# Altium PCB MAIN BOARD V1.3.PcbDoc
Units mil, origin at the board's own origin, x right, y up, seen from the top; angles counter-clockwise.
Board outline 6000 x 4000 mil, 2 copper layers (Top Layer, Bottom Layer); 91 components, 77 nets, 363 pads, 60 vias.
Unrouted connection lines stored in the file: 10.
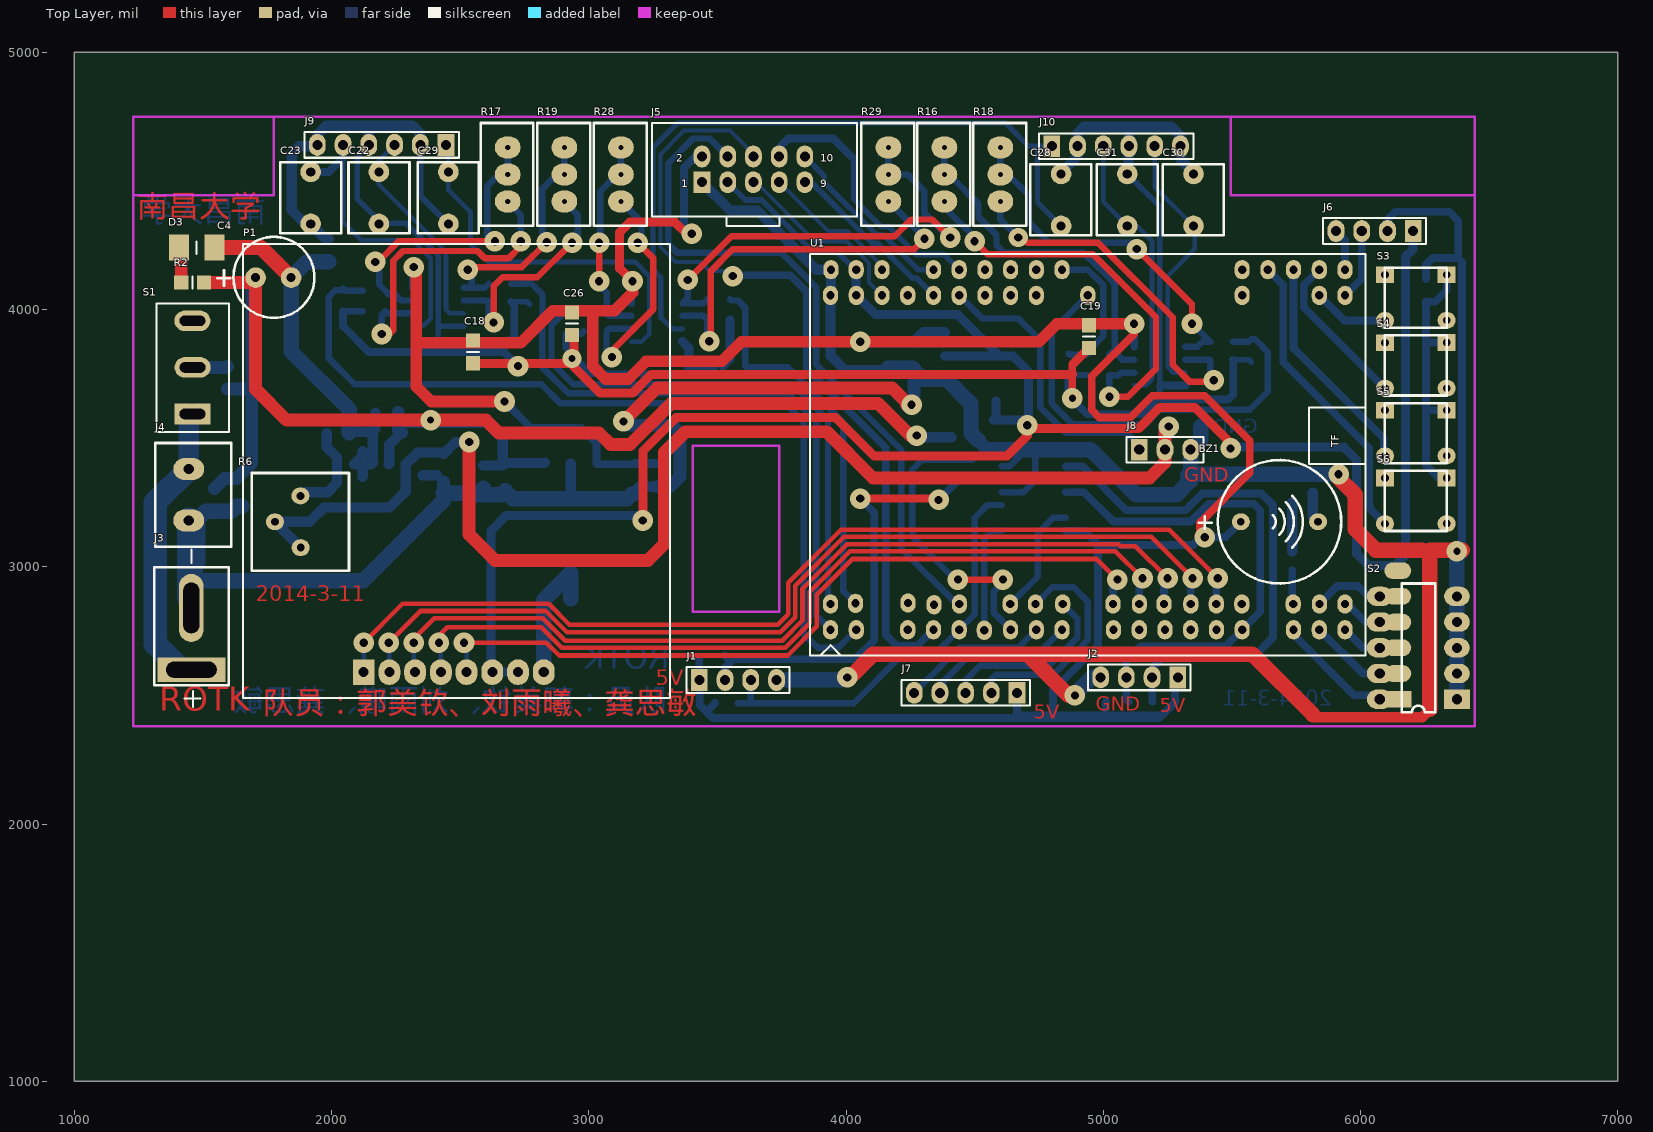
[diagram p0: Top Layer view]
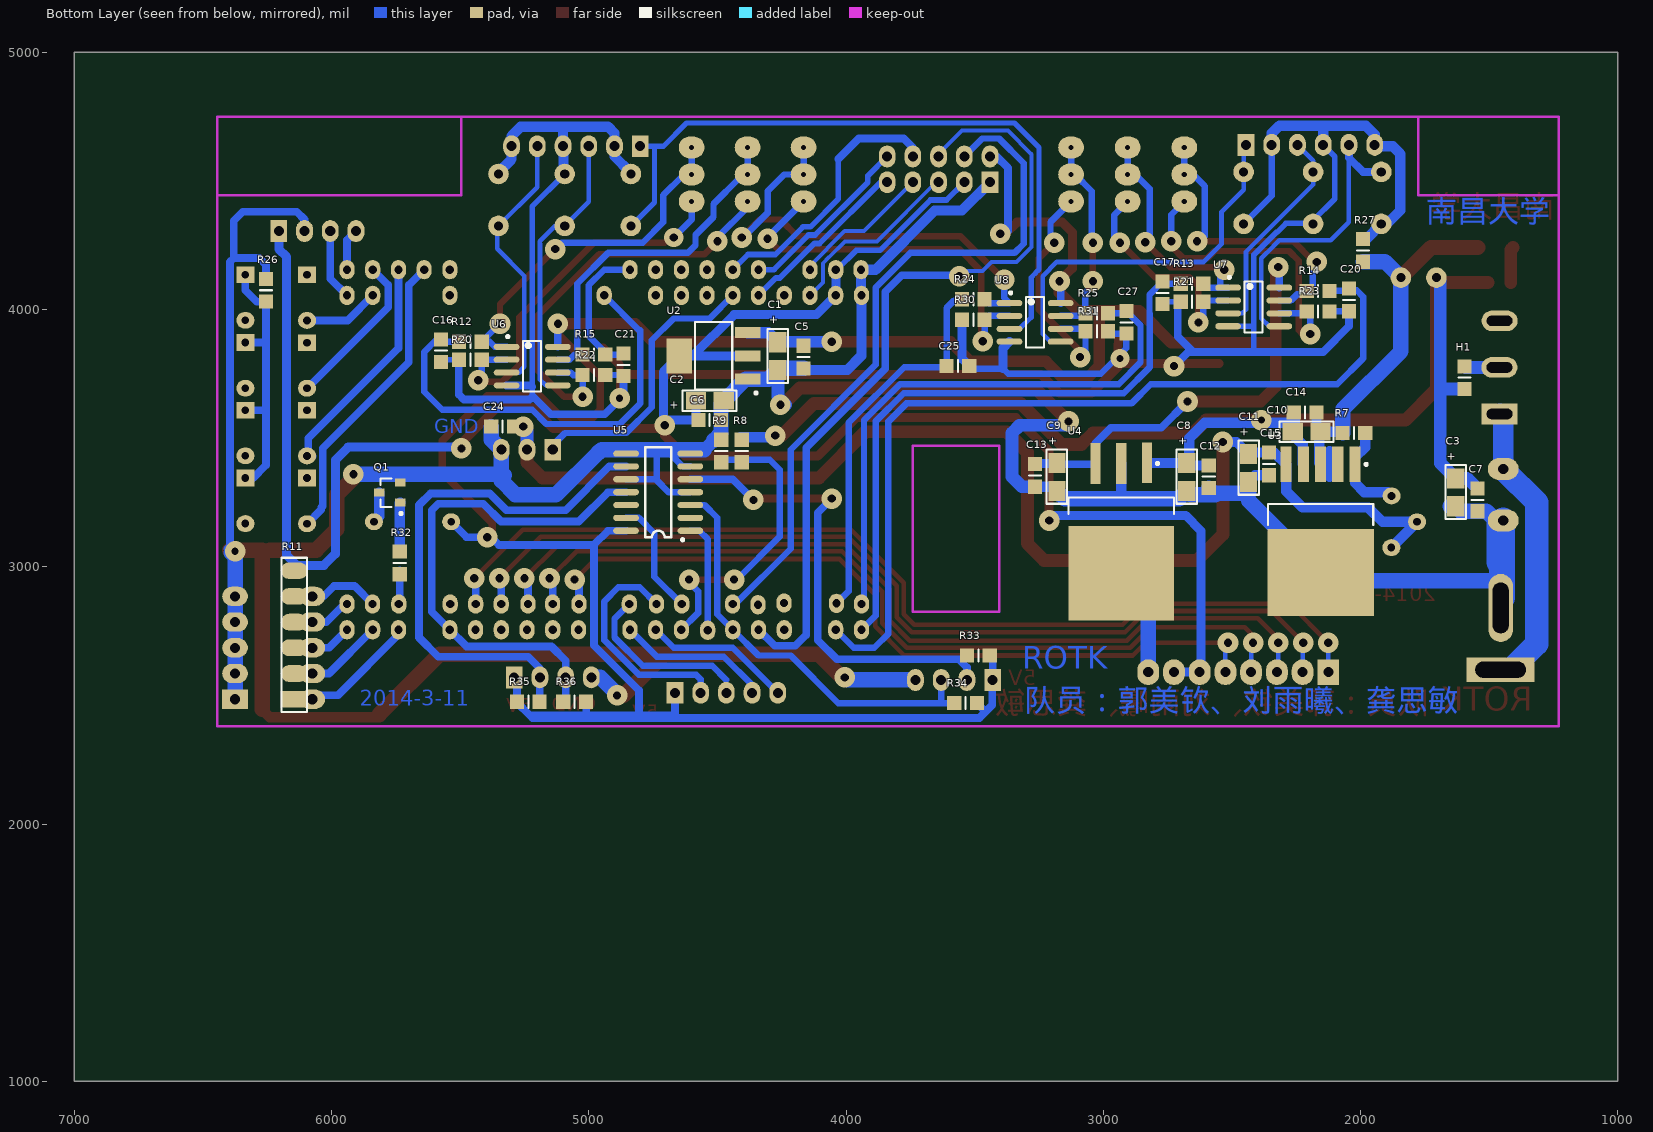
[diagram p1: Bottom Layer view, seen from below]

## Layer stack, top to bottom
Top Layer: signal copper 1.4
Dielectric: dielectric 12.6, FR-4, Dk 4.8
Bottom Layer: signal copper 1.4

## Board outline
1000,1000 7000,1000 7000,5000 1000,5000

## Design rules (kind name [scope] priority, off if disabled: settings)
Clearance [All] p1: gap=10
Height [All] p1: minheight=0 maxheight=10000 prefheight=500
PolygonConnect [All] p1: connectstyle=Relief reliefconductorwidth=10 reliefentries=4 polygonreliefangle="90 Angle"
RoutingVias [All] p1: holewidth=28 width=50 viastyle="Through Hole" minholewidth=28 minwidth=50 maxholewidth=28 maxwidth=50
SilkscreenOverComponentPads [All] p1: minsilkscreentomaskgap=10
SolderMaskExpansion [All] p1: expansion=4
Width [All] p1: maxlimit=100 minlimit=10 preferedwidth=100
26 further rules are at their usual default settings.

## Components (designator, comment, footprint, x,y, rotation, side; value= is the part's Value field where it differs from the comment)
BZ1 "Speaker" SPEAKER 5535,3175 r0 top
C1 "CAP_3216(1206)" CAP_3216（1206） 4265,3820 r270 bottom
C2 "CAP_3216(1206)" CAP_3216（1206） 4530,3645 r180 bottom
C3 "CAP_3216(1206)" CAP_3216（1206） 1630,3290 r270 bottom
C4 "CAP_220UF" CAP_DIP_8×11.5 1775,4125 r0 top
C5 "CAP_0805" C0805 4165,3815 r90 bottom
C6 "CAP_0805" C0805 4530,3570 r0 bottom
C7 "CAP_0805" C0805 1545,3260 r90 bottom
C8 "CAP_3216(1206)" CAP_3216（1206） 2675,3350 r270 bottom
C9 "CAP_3216(1206)" CAP_3216（1206） 3180,3350 r270 bottom locked
C10 "CAP_3216(1206)" CAP_3216（1206） 2210,3525 r180 bottom
C11 "CAP_3216(1206)" CAP_3216（1206） 2435,3385 r270 bottom
C12 "CAP_0805" C0805 2590,3350 r90 bottom
C13 "CAP_0805" C0805 3265,3355 r90 bottom locked
C14 "CAP_0805" C0805 2215.32,3600 r0 bottom
C15 "CAP_0805" C0805 2355,3400 r90 bottom
C16 "CAP_0805" C0805 5575,3840 r270 bottom
C17 "CAP_0805" C0805 2770,4065 r270 bottom
C18 "CAP_0805" C0805 2550,3835 r90 top
C19 "CAP_0805" C0805 4945,3895 r90 top
C20 "CAP_0805" C0805 2045,4037.6 r270 bottom
C21 "CAP_0805" C0805 4865,3785 r270 bottom
C22 "CAP_682" CAP_682 2180,4435 r270 top
C23 "CAP_682" CAP_682 1915,4435 r270 top
C24 "CAP_0805" C0805 5335,3545 r180 bottom
C25 "CAP_0805" C0805 3565,3780 r180 bottom
C26 "CAP_0805" C0805 2935,3945 r90 top
C27 "CAP_0805" C0805 2910,3950.32 r270 bottom
C28 "CAP_682" CAP_682 4840,4425 r90 top
C29 "CAP_682" CAP_682 2450,4435 r270 top
C30 "CAP_682" CAP_682 5355,4425 r90 top
C31 "CAP_682" CAP_682 5097.5,4425 r90 top
D3 "LED_3528_R" LED_3528_R 1475,4240 r0 top
H1 "Inductor_SMD" R0805 1595,3735 r90 bottom
J1 "Encoder1" HEADER1X4 3580,2560 r0 top
J2 "Encoder2" HEADER1X4 5140,2570 r180 top
J3 "Battery" TERMINAL_T 1455,2600 r0 top
J4 "MotorPower" HEADER-5.08 1445,3290 r270 top locked
J5 "Header2x5_S" HEADER2X5_S 3635,4545 r0 top locked
J6 "Bluetooth" HEADER1X4 6055,4305 r180 top
J7 "PWM_OUT" HEADER1X5 4470,2520 r180 top
J8 "Servo" HEADER1X3 5240,3455 r0 top
J9 "Header1x6" HEADER1X6 2190,4645 r180 top
J10 "Header1x6" HEADER1X6 5055,4630 r0 top
P1 "NOKIA 5110" "NOKIA 5110_1P" 2485,3425 r0 top locked
Q1 "NPN" SOT-23 5770,3270 r90 bottom
R2 "RES" R0805 1460,4105 r180 top
R6 "RES_Change_P" RES_Change_P 1830,3175 r180 top
R7 "RES" R0805 2025.32,3520 r180 bottom
R8 "RES" R0805 4405,3450 r90 bottom
R9 "RES" R0805 4485,3450 r270 bottom
R11 "RES" RES_6P 6140,2740 r90 bottom
R12 "RES" R0805 5460,3875 r180 bottom
R13 "RES" R0805 2655,4100 r180 bottom
R14 "RES" R0805 2165,4072.6 r0 bottom
R15 "RES" R0805 4980,3825 r0 bottom
R16 "RES_Change_W" RES_Change_W 4377.5,4530 r90 top locked
R17 "RES_Change_W" RES_Change_W 2680,4530 r90 top locked
R18 "RES_Change_W" RES_Change_W 4595,4530 r90 top locked
R19 "RES_Change_W" RES_Change_W 2900,4530 r90 top locked
R20 "RES" R0805 5460,3805 r180 bottom
R21 "RES" R0805 2655,4030 r180 bottom
R22 "RES" R0805 4980,3745.32 r0 bottom
R23 "RES" R0805 2165,3992.6 r0 bottom
R24 "RES" R0805 3505,4040 r180 bottom
R25 "RES" R0805 3025,3985.32 r0 bottom
R26 "RES" R0805 6255,4075 r270 bottom
R27 "RES" R0805 1990,4230 r270 bottom
R28 "RES_Change_W" RES_Change_W 3120,4530 r90 top locked
R29 "RES_Change_W" RES_Change_W 4160,4530 r90 top locked
R30 "RES" R0805 3505,3960 r180 bottom
R31 "RES" R0805 3025,3915.32 r0 bottom
R32 "RES" R0805 5735,3015 r90 bottom
R33 "RES" R0805 3485,2655 r180 bottom
R34 "RES" R0805 3535,2470 r180 bottom
R35 "RES" R0805 5235,2475 r0 bottom
R36 "RES" R0805 5055,2475 r180 bottom
S1 "SW-2_T" "SW-2 - T" 1460,3775 r90 top locked
S2 "SW" DIP-10 6225,2680 r180 top
S3 "SW-PB" BUTTON 6335,4135 r0 top
S4 "SW-PB" BUTTON 6335,3871.67 r0 top
S5 "SW-PB" BUTTON 6335,3608.33 r0 top
S6 "SW-PB" BUTTON 6335,3345 r0 top
U1 "MK60DN512VLQ100" LQ_K60P100 3940,2750 r0 top locked
U2 "LM1117" SOT-223 4515,3820 r0 bottom
U3 "LM2941" TO-263-5S-A 2140,3110 r90 bottom locked
U4 "LM2940" TO-263-3S 2925,3170 r90 bottom locked
U5 "CD4013" SOP-14 4620,3140 r0 bottom
U6 "LMV358" SOP-8 5265,3840 r180 bottom
U7 "LMV358" SOP-8 2460,4070 r180 bottom
U8 "LMV358" SOP-8 3310,4010 r180 bottom

## Footprints (in the part's own frame and the unit in brackets; to place one, negate y for a bottom-side part, rotate by r counter-clockwise, add the part's x,y. Pads: shape width x height; smd on the part's side, far side on the other; paste and mask are expansions set on the pad)
BUTTON [mil]
  rect 70x65 hole 30: 1(-239.88,-0.32) 1(-0.04,0)
  oval 70x65 hole 30: 2(-239.88,-177.48) 2(-0.04,-177.17)
  silkscreen extent -240,-206 0,28, body extent -277,-208 37,28, height 193
C0805 [mm] "Chip Resistor, Body 2.0x1.2mm, IPC Medium Density"
  rect 1.4x1.4 smd: 1(-1.118,0) 2(1.118,0)
  silkscreen extent 0,-0.6 0,0.6, body extent -1,-0.6 1,0.6, height 1.2
CAP_682 [mil]
  round 80 hole 35.43: 1(-100,4) 2(102,4)
  silkscreen extent -137,-114 139,123
CAP_3216（1206） [mm]
  rect 2x1.7 smd: 1(-1.35,0) 2(1.397,0)
  silkscreen extent -2.67,-1.02 2.67,1.02, body extent -1.75,-0.79 1.64,0.81, height 2.05
CAP_DIP_8×11.5 [mil]
  round 80 hole 35.43: 1(-70,-1) 2(68,-1)
  silkscreen extent -219,-157 158,157, body extent -166,-172 167,162, height 512
DIP-10 [mil]
  rect 100x75 hole 39: 1(-150,195)
  oval 100x75 hole 39: 2(-150,95) 3(-150,-5) 4(-150,-105) 5(-150,-205) 6(150,-205) 7(150,-105) 8(150,-5) 9(150,95) 10(150,195)
  silkscreen extent -65,-255 65,245, body extent -196,-274 194,266, height 276
HEADER1X3 [mil]
  rect 65x85 hole 39: 1(-100,0)
  oval 65x85 hole 39: 2(0,0) 3(100,0)
  silkscreen extent -150,-50 150,50, body extent -145,-48 155,50, height 323
HEADER1X4 [mil]
  rect 65x85 hole 39: 1(-150,0)
  oval 65x85 hole 39: 2(-50,0) 3(50,0) 4(150,0)
  silkscreen extent -200,-50 200,50, body extent -200,-48 200,50, height 323
HEADER1X5 [mil]
  rect 65x85 hole 39: 1(-195,10)
  oval 65x85 hole 39: 2(-95,10) 3(5,10) 4(105,10) 5(205,10)
  silkscreen extent -245,-40 255,60, body extent -241,-39 259,59, height 323
HEADER1X6 [mil]
  rect 65x85 hole 39: 1(-255,5)
  oval 65x85 hole 39: 2(-155,5) 3(-55,5) 4(45,5) 5(145,5) 6(245,5)
  silkscreen extent -305,-45 295,55, body extent -300,-45 300,53, height 323
HEADER2X5_S [mil]
  rect 65x85 hole 39: 1(-195,-50)
  oval 65x85 hole 39: 2(-195,50) 3(-95,-50) 4(-95,50) 5(5,-50) 6(5,50) 7(105,-50) 8(105,50) 9(205,-50) 10(205,50)
  silkscreen extent -390,-221 407,180, body extent -398,-193 402,181, height 354
HEADER-5.08 [mil]
  oval 85x120 hole 39: 1(-90,0) 2(110,0)
  silkscreen extent -191,-131 213,165, body extent -214,-128 234,167, height 392
LED_3528_R [mm] "Chip Resistor, Body 2.0x1.2mm, IPC Medium Density"
  rect 2x2.6 smd: 1(-1.725,0.028) 2(1.775,0.028)
  silkscreen extent 0,-0.6 0,0.6, body extent -1.72,-1.37 1.78,1.43, height 1.75
LQ_K60P100 [mm]
  oval 1.5x1.905 hole 0.82: 1(0,0.127) 2(0,2.667) 3(2.54,0.127) 4(2.47,2.737) 7(7.62,0.127) 8(7.64,2.767) 9(10.16,0.127) 10(10.22,2.607) 11(12.7,0.127) 12(12.72,2.667) 13(15.18,0.077) 15(17.78,0.127) 16(17.74,2.667) 17(20.32,0.127) 18(20.24,2.667) 19(22.86,0.127) 20(22.92,2.667) 23(27.94,0.127) 24(27.88,2.667) 25(30.48,0.127) 26(30.49,2.667) 27(33.02,0.127) 28(32.93,2.667) 29(35.56,0.127) 30(35.57,2.667) 31(38.1,0.127) 32(38.09,2.667) 33(40.64,0.127) 34(40.61,2.667) 37(45.72,0.127) 38(45.68,2.667) 39(48.26,0.127) 40(48.27,2.667) 41(50.8,0.127) 42(50.79,2.667) 43(0,33.147) 44(0.04,35.687) 45(2.54,33.147) 46(2.53,35.687) 47(5.08,33.147) 48(5.08,35.687) 49(7.62,33.147) 51(10.16,33.147) 52(10.16,35.687) 53(12.7,33.147) 54(12.7,35.687) 55(15.24,33.147) 56(15.24,35.687) 57(17.78,33.147) 58(17.78,35.687) 59(20.32,33.147) 60(20.32,35.687) 62(22.86,35.687) 63(25.4,33.147) 75(40.64,33.147) 76(40.64,35.687) 78(43.18,35.687) 80(45.72,35.687) 81(48.26,33.147) 82(48.26,35.687) 83(50.8,33.147) 84(50.8,35.687)
  round 0 all layers, no hole: 5(5.08,0.127) 6(5.07,2.687) 14(15.15,2.667) 21(25.4,0.127) 22(25.37,2.667) 35(43.18,0.127) 36(43.17,2.667) 50(7.62,35.687) 61(22.86,33.147) 64(25.4,35.687) 66(27.94,35.687) 67(30.48,33.147) 68(30.48,35.687) 69(33.02,33.147) 70(33.02,35.687) 71(35.56,33.147) 72(35.56,35.687) 73(38.1,33.147) 74(38.1,35.687) 77(43.18,33.147) 79(45.72,33.147)
  round 0 all layers, no hole paste+0: 65(27.94,33.147)
  silkscreen extent -2.03,-2.41 52.83,37.21, body extent -1.52,-1.1 52.2,36.79, height 8.5
"NOKIA 5110_1P" [mil]
  rect 85x100 hole 39: 1(-360,-835)
  oval 85x100 hole 39: 2(-260,-835) 3(-160,-835) 4(-60,-835) 5(40,-835) 6(140,-835) 7(240,-835) 8(340,-835)
  silkscreen extent -830,-935 830,830, body extent -416,-888 394,-790, height 335
R0805 [mm] "Chip Resistor, Body 2.0x1.2mm, IPC Medium Density"
  rect 1.4x1.4 smd: 1(-1.118,0) 2(1.118,0)
  silkscreen extent 0,-0.6 0,0.6, body extent -1.49,-0.7 1.51,0.7, height 0.49
RES_6P [mil]
  rect 65x105 all layers, no hole: 1(-255,5)
  oval 65x105 all layers, no hole: 2(-155,5) 3(-55,5) 4(45,5) 5(145,5) 6(245,5)
  silkscreen extent -305,-45 295,55, body extent -306,-42 292,56, height 187
RES_Change_P [mil]
  oval 70x65 hole 30: 1(-49,-100.5) 2(50,0.5) 3(-50,100.5)
  silkscreen extent -238,-189 140,191, body extent -257,-187 198,189, height 184
RES_Change_W [mil]
  oval 85x100 hole 20: 1(-110,-5) 2(100,-5) 3(-5,-5)
  silkscreen extent -205,-105 195,100, body extent -195,-106 179,85, height 453
SOP-8 [mm]
  oval 2.54x0.6 smd: 1(-1.384,0.381) 2(-1.384,-0.889) 3(-1.384,-2.159) 4(-1.384,-3.429) 5(3.67,-3.429) 6(3.67,-2.159) 7(3.67,-0.889) 8(3.67,0.381)
  silkscreen extent -1.39,-4.02 2.03,1.52, body extent -1.88,-4.03 4.16,0.99, height 1.6
SOP-14 [mil]
  oval 100x24 smd: 1(-15,0) 2(-15,-50) 3(-15,-100) 4(-15,-150) 5(-15,-200) 6(-15,-250) 7(-15,-300) 8(235,-300) 9(235,-250) 10(235,-200) 11(235,-150) 12(235,-100) 13(235,-50) 14(235,0)
  silkscreen extent 10,-325 160,40, body extent -36,-353 251,48, height 43
SOT-23 [mil] "SOT-323/SC-70; 3 Leads; Body 2.2 x 2.2 mm, inc. leads (LxW max)"
  rect 31.5x41.34 smd: 1(-20,-37) 2(57,-37) 3(19,45)
  silkscreen extent -68,-45 74,40, body extent -40,-45 78,55, height 43
SOT-223 [mm]
  rect 2.54x1.1 smd: 1(-3.375,2.3) 2(-3.375,0) 3(-3.375,-2.3)
  rect 2.54x3.45 smd: 4(3.375,0)
  silkscreen extent -4.31,-3.35 1.85,3.81, body extent -3.48,-3.25 3.48,3.25, height 1.66
SPEAKER [mil]
  oval 70x65 hole 30: 1(0,0) 2(300,0)
  silkscreen extent -164,-240 390,240, body extent -86,-234 386,238, height 366
"SW-2 - T" [mil]
  rect 80x140 hole 40 slot 100 at 90 deg: 1(-181,1)
  oval 80x140 hole 40 slot 100 at 90 deg: 2(0,0) 3(181,1)
  silkscreen extent -252,-141 249,140, body extent -251,-201 250,199, height 1120
TERMINAL_T [mil]
  rect 265x95 hole 62.99 slot 196.85 at 0 deg: 1(0,0)
  oval 95x265 hole 62.99 slot 196.85 at 90 deg: 2(0,240)
  silkscreen extent -145,-145 145,468, body extent -150,-58 146,400, height 335
TO-263-3S [mil]
  rect 158x39.37 smd: 1(235,-95) 2(231.22,5) 3(231.22,105)
  rect 368x411.42 smd: 4(-195,5)
  silkscreen extent 34,-200 236,210, body extent -350,-195 258,205, height 185
TO-263-5S-A [mm]
  rect 3.5x1.1 smd: 1(7.32,-3.019) 2(7.32,-1.319) 3(7.32,0.381) 4(7.32,2.081) 5(7.32,3.781)
  rect 8.6x10.5 smd: 6(-3.373,0.381)
  silkscreen extent 1.33,-4.82 7.44,5.58, body extent -6.6,-4.7 7.41,5.46, height 4.56

## Part data
BZ1: "Loudspeaker"
C1 C2 C3 C8 C9 C10 C11: library part CAP_321
J1 J2: library part Header1x4
J3: library part Header-T
J4: library part Header-5.08
J6: library part Blutooth
J7: library part Header1x5
J8: library part Header1x3
P1: library part "Nokia 5110 _1P"
Q1: library part NPN(SOT-23), "NPN Bipolar Transistor"
R11: library part RES_ARRAY_6P
S2: library part SW-DIP5
U1: library part LQ_K60P100
U2: library part LM1117_SOT_223
U3: library part LM2941_A
U4: library part LM2940_TO_263
U5: library part CD4013BM

## Via types
v1: diameter 80, hole 32, Top Layer to Bottom Layer, 55 vias
v2: diameter 80, hole 28, Top Layer to Bottom Layer, 3 vias
v3: diameter 75, hole 32, Top Layer to Bottom Layer, 1 vias
v4: diameter 75, hole 28, Top Layer to Bottom Layer, 1 vias

## Nets (pads, with @x,y where several pads share a name; then routed paths per layer and width w, separated by ;. In a path a pad name is that pad's centre, name@x,y a point inside that pad or via, vN(x,y) a via of type N, cw(c..) or ccw(c..) an arc to the next point about the centre after c; other vN are vias at no path point)
1A: J1.2 R33.1 U5.5 | length 1879.7
  Top Layer w30: v1(4055,3265) 4355,3265 v1(4360,3260)
  Bottom Layer w30: J1.2@3519,2549 J1.2 3530,2609 R33.1@3552.5,2631.5 ; R33.1 R33.1@3552.5,2631.5 ; v1(4055,3265) 4110,3210 4110,2715 4035,2640 3561,2640 R33.1@3552.5,2631.5 ; v1(4360,3260) 4440,3340 U5.5
1B: J1.3 R34.1 U1.11 U5.3 | length 1668.6
  Bottom Layer w25: R34.1 4030,2470 4215,2655 4340,2655 U1.11 ; 3630,2470 J1.3@3630,2569 ; U1.11@4440,2750 U1.11 ; U5.3 4550,3240 4500,3190 4500,2815 U1.11
2A: J2.2 R35.1 U5.9 | length 2086.1
  Bottom Layer w30: U5.9 4920,3390 5090,3220 5320,3220 5385,3285 5615,3285 5660,3240 5660,2725 5585,2650 5235,2650 5190,2605 J2.2 5190,2476 R35.1
2B: J2.3 R36.1 U1.33 U5.11 | length 1999.4
  Bottom Layer w30: U5.11 4925,3290 5040,3175 5041,3176 5341,3176 5410,3245 5585,3245 5610,3220 5610,2825 U1.33 5475,2690 5145,2690 5090,2635 J2.3 5090,2484 R36.1
3.3V: C2.1 C6.2 J5.3 J6.1 P1.6 P1.7 R11.6 U1.45 U1.46 U2.2 U2.4 | length 8699.6
  Top Layer w35: v1(3210,3180) 3210,3450 3340,3580 3960,3580 4110,3430 4625,3430 4705,3510 v1(4705,3550) 4717.5,3537.5 5137.5,3537.5 5220,3620 5355,3620 v1@5495,3480
  Bottom Layer w22: J5.3 3609,4426 3671.98,4426 3867.98,4230 3960,4230 4035,4155 U1.46
  Bottom Layer w35: P1.7 P1.6 2620,2595 2620,3140 2680,3200 3190,3200 v1(3210,3180) ; U1.46 4039.61,4055.39 U1.45 4115,3980 4435,3980 4595,3820 U2.4@4630,3820 ; U2.2 U2.4@4630,3820 ; C2.1 4583.15,3579.15 C6.2 4685,3570 v1(4705,3550) ; v1@4710,3560 4710,3757.87 U2.4 U2.4@4630,3820 ; v1(5495,3460) 5490,3465 5935,3465 5985,3415 5985,3050 6030,3005 6135,3005 6175,3045 6175,4205 6205,4235 J6.1
5V: BZ1.1 C1.1 C5.2 C9.1 C13.2 C18.2 C19.2 C26.2 J1.1 J2.1 J5.2 J7.1 R33.2 R34.2 R35.2 R36.2 U2.3 U4.3 U5.14 U6.8 U7.8 U8.8 | length 12544.1
  Top Layer w30: v1(5120,3945) 5120,3905 4955,3740 4955,3610 4985,3580 5105,3580 5190,3665 5395,3665 5570,3490 5570,3365 5375,3170 5375,3120 5380,3115 v1(5395,3115)
  Top Layer w35: v1@3175,4115 v1(3170,4110) 3120,4160 3120,4300 3160,4340 3335,4340 v1@3380,4295
  Top Layer w45: v1(2320,4165) 2330,4165 2330,3875 ; v1(2672.5,3642.5) 2387.5,3642.5 2330,3700 2330,3875 ; v1(3170,4110) 3170,4065 3100,3995 3015,3995 ; v1(5120,3945) 4820,3945 4750,3875 v1(4055,3875) 3593.5,3875 3516.75,3798.25 3222.54,3798.25 3154.29,3730 3065,3730 3015,3780 3015,3995 ; 2330,3875 2334.94,3870.06 2735.06,3870.06 2860,3995 3015,3995
  Bottom Layer w30: U7.8 2315.51,4150.51 2330,4165 v1(2320,4165) ; v1(2672.5,3642.5) 2775,3540 2970,3540 3030,3480 U4.3 ; U4.3@3032.22,3399 C13.2 3260.85,3403.15 C9.1 ; U8.8 3165.51,4105.51 v1(3170,4110) ; v1@3370,4305 3370,4550 3415,4595 J5.2 ; R33.2@3430,2644 J1.1 3431,2559 3431,2462.53 3454.26,2439.26 ; R34.2 3460.26,2439.26 3454.26,2439.26 ; J7.1 4665,2427.44 4670,2422.44 4815,2422.44 ; U5.14 4925,3140 4980,3085 ; R36.2 5010,2474 5010,2422.44 ; v1(5120,3945) 5120.51,3944.49 U6.8 ; J2.1 5279,2559 R35.2 5279,2472.53 5228.91,2422.44 ; BZ1.1 5475,3115 5380,3115 5350,3085 4980,3085 ; 3454.26,2439.26 3481.09,2412.44 5218.91,2412.44 5228.91,2422.44 ; 4815,2422.44 4805,2432.44 4805,2520 4980,2695 4980,3085 ; 4815,2422.44 5010,2422.44 ; 5010,2422.44 5228.91,2422.44
  Bottom Layer w45: v1(4055,3875) 4263.15,3875 C1.1 4302.4,3910.55 U2.3
  other v1: 3400,4295
6V: C11.1 C15.2 C24.2 J8.2 R6.2 R6.3 U3.5 | length 4923.8
  Top Layer w50: v1(2535,3485) 2535,3125 2635,3025 3230,3025 3295,3090 3295,3445 3375,3525 3925,3525 4105,3345 5180,3345 5240,3405 J8.2 5240,3530 v1(5255,3545)
  Bottom Layer w40: R6.3 R6.2 1914.5,3174.5 1970,3230 2225,3230 2288.86,3293.86 U3.5 2334.67,3444 C15.2 C11.1@2429.15,3444 ; C11.1 2481.85,3485 v1(2535,3485)
  Bottom Layer w50: J8.2 v1@5240,3529
7.2V: C3.1 C4.1 C7.2 C8.1 C10.1 C12.2 C14.2 H1.1 R2.1 R8.2 U3.4 U4.1 | length 5600.2
  Top Layer w50: R2.1 1686,4105 C4.1 1705,3690 1825,3570 v2@2370,3570 ; v2@2375,3565 v2@2370,3570 ; v1(4275,3510) 4250,3510 4125,3635 3320.75,3635 3160.75,3475 3085,3475 3040,3520 2650,3520 2600,3570 v2(2385,3570) v2@2370,3570
  Bottom Layer w40: U3.4 2224.37,3400.63 2224.37,3474.37 C10.1@2271.73,3521.73 ; C10.1@2259.32,3534.15 C10.1@2270.17,3545 ; 2259.32,3570 2269.32,3560 2605,3560 2665.85,3499.15 C8.1@2665.85,3412.3 ; C12.2 2665.85,3394 C8.1@2665.85,3412.3 ; U4.1 2828.15,3403.15 C8.1 C8.1@2665.85,3412.3 ; v1(4275,3510) 4281,3504 R8.2@4410,3504
  Bottom Layer w50: C7.2 1584.15,3343.15 C3.1 1690,3403.15 1690,4109 C4.1 ; H1.1 1689,3691 ; C14.2 2259.32,3570 2259.32,3534.15 C10.1@2271.73,3521.73
AD0: R8.1 R9.2 U1.15 | length 1173.8
  Top Layer w25: v1(4435,2950) v1(4610,2950)
  Bottom Layer w25: v1@4425,2950 4257.5,3117.5 4257.5,3377.5 4296,3416 4410,3416 R9.2@4490,3416 ; v1@4635,2945 4615,2945 4575,2905 4575,2820 U1.15
AD1: C17.1 R13.1 U1.1 | length 2414.3
  Bottom Layer w25: R13.1 2761,4100 C17.1 2770,4107.94 2820.06,4057.88 2820.06,3984.06 2820,3984 2820,3775 2920,3675 3775,3675 3885,3565 3885,2810 U1.1
AD2: C20.1 R14.1 U1.3 | length 3416.1
  Bottom Layer w25: R14.1 2054,4072.6 C20.1 2038.4,4075 2015,4075 1990,4050 1990,3810 2090,3710 2815,3710 2890,3635 3765,3635 3835,3565 3835,2740 3890,2685 3970,2685 U1.3
AD3: C25.1 R24.1 U1.4 | length 1494
  Bottom Layer w25: R24.1 3554,4035 3580,4035 3609,4006 C25.1 3613,3776 3774,3776 3990,3560 3990,2905 U1.4
AD4: C27.1 R25.1 U1.2 | length 2184.1
  Bottom Layer w25: R25.1 2919,3985.32 C27.1 2855.06,3939.37 2855.06,3794.94 2940,3710 3790,3710 3930,3570 3930,2865 U1.2
AD5: C16.1 R12.1 U1.63 | length 1720.9
  Bottom Layer w25: U1.63 4805,3920 4800,3920 4800,3635 4880,3555 5165,3555 5220,3610 5570,3610 5640,3680 5640,3835 5591,3884 C16.1 5566,3875 R12.1
AD6: C21.1 R15.1 U1.62 | length 557.3
  Bottom Layer w25: U1.62 4940,4155 5000,4095 5000,3897 4932,3829 R15.1 4869,3825 C21.1
AGND: C16.2 C17.2 C18.1 C19.1 C20.2 C21.2 C22.2 C23.2 C25.2 C26.1 C27.2 C28.2 C29.2 C30.2 C31.2 J9.2 J9.4 J9.6 J10.2 J10.4 J10.6 R20.1 R21.1 R22.1 R23.1 R27.1 R30.1 R31.1 U6.4 U7.4 U8.4 | length 10641.1
  Top Layer w30: v2(4880,3655) 4880,3750 4880,3786 4885,3791
  Top Layer w35: C18.1 2551,3790 2940,3790 v4@2945,3795 ; C26.1 2940,3896 v4@2945,3795 ; 4880,3750 4878.25,3748.25 3243.25,3748.25 3170,3675 3045,3675 2940,3780 v4@2945,3795 ; 4885,3791 C19.1
  Bottom Layer w22: J9.4 2100,4595 2100,4430 2184,4346 C22.2 2186,4335 2290,4335 2325,4300 2327.43,4300 2415,4212.43 2415,3987.06 2415.51,3986.55 2415.51,3935 ; 2415.51,3835 2415.51,3935 ; U7.4 2415.51,3935 ; R21.1 2761,4030 C17.2 ; C21.2 4869.32,3745.32 R22.1 ; C31.2@5096.5,4530 C31.2 5098.5,4522 5220,4400.5 5220,3700 5220,3660 ; R20.1 5566,3805 C16.2
  Bottom Layer w25: C20.2 2046,3992.6 R23.1 ; J9.2 2345,4442 C29.2 ; R31.1 2972,3906.32 C27.2 2910,3850 3010,3750 3369.49,3750 3389.49,3770 3490,3770
  Bottom Layer w30: C20.2 2045,3935 2145,3835 ; 2150,3835 2415.51,3835 2650,3835 ; R21.1 2710,4019 2710,3895 2650,3835 ; v1(2725,3780) 2670,3835 2650,3835 ; C21.2 4865,3665 4937.5,3592.5 5147.5,3592.5 5217.5,3662.5 5220,3660 5230,3650 5485,3650 5505,3670 5505,3804 R20.1 ; 5220,3700 5225,3705 U6.4
  Bottom Layer w35: U8.4 3389.49,3850 3389.49,3770 ; C25.2 3549,3808 R30.1
  Bottom Layer w40: R27.1 1978,4274 C23.2 1897,4333 1845,4385 1845,4605 1875,4635 1940,4635 J9.6 1945,4680 1980,4715 2155,4715 ; J9.4 2145,4705 2155,4715 ; J9.2 2345,4685 2315,4715 2155,4715 ; C28.2@4841,4536 4900,4595 J10.2 4900,4685 4925,4710 5100,4710 ; C31.2@5098.5,4522 5098.5,4633.5 J10.4 5100,4710 ; C30.2@5356,4529 5300,4585 J10.6 5300,4675 5265,4710 5100,4710
  other v4: 2935,3810
BEEP: R32.1 U1.38 | length 132.4
  Bottom Layer w30: R32.1@5735,2986 5735,2858.43 U1.38
BN1: R11.1 S2.10 U1.37 | length 458.6
  Bottom Layer w30: U1.37 5740,2735 5975,2500 6060,2500 S2.10
BN2: R11.2 S2.9 U1.39 | length 305.4
  Bottom Layer w30: U1.39 6010,2585 S2.9
BN3: R11.3 S2.8 U1.41 | length 164
  Bottom Layer w30: U1.41 6010,2685 S2.8
BN4: R11.4 S2.7 U1.42 | length 164.4
  Bottom Layer w30: U1.42 5950,2855 6020,2785 S2.7
BN5: R11.5 S2.6 U1.40 | length 280.5
  Bottom Layer w30: U1.40 5910.84,2925.44 5990,2925.44 6030.44,2885 S2.6
CE: P1.2 U1.30 | length 3712.2
  Top Layer w18: v1(2222.5,2705) 2345,2827.5 2345,2828 2832.4,2828 2915.4,2745 3744.6,2745 3803,2803.4 3803,2926.79 3992.21,3116 5186.5,3116 v1(5347.5,2955)
  Bottom Layer w18: v1(2222.5,2705) 2225,2702.5 P1.2
  Bottom Layer w30: U1.30 v1@5340.39,2947.89
CLK: P1.5 U1.24 | length 3042.8
  Top Layer w18: v1(2515,2705) 2835,2705 2885,2655 3773.39,2655 3887,2768.61 3887,2892 4025,3030 4975,3030 v1(5055,2950)
  Bottom Layer w18: v1(2515,2705) 2525,2695 P1.5
  Bottom Layer w30: U1.24 5037.64,2932.64 v1(5055,2950)
DC: P1.3 U1.28 | length 3519.6
  Top Layer w18: v1(2320,2705) 2320,2720 2400,2800 2820.8,2800 2907.8,2713 3752.2,2713 3831,2791.8 3831,2915.2 4003.8,3088 5059.1,3088 5067.1,3080 5125,3080 v1(5250,2955)
  Bottom Layer w18: v1(2320,2705) 2320,2595 P1.3
  Bottom Layer w30: U1.28 5236.46,2941.46 v1(5250,2955)
DGND: C1.2 C2.2 C3.2 C4.2 C5.1 C6.1 C7.1 C8.2 C9.2 C10.2 C11.2 C12.1 C13.1 C14.1 C15.1 C24.1 D3.2 J1.4 J2.4 J3.2 J4.2 J5.1 J6.2 J8.3 P1.8 Q1.2 R7.1 R9.1 R26.1 R27.2 S2.1 S2.2 S2.3 S2.4 S2.5 U1.43 U1.44 U2.1 U3.2 U3.3 U3.6 U4.2 U4.4 U5.4 U5.6 U5.7 U5.8 U5.10 | length 17942.1
  Top Layer w40: 5815,2425 5825,2415 6240,2415 6270,2445
  Top Layer w50: v1(3135,3565) 3265,3695 4180,3695 4235,3640 4235,3630 v1(4255,3630)
  Top Layer w60: D3.2 1725.88,4241.12 C4.2 ; v1(4005,2570) 4015,2570 4105,2660 4705,2660 ; v1(4890,2500) 4865,2500 4705,2660 ; 5815,2425 5580,2660 4705,2660 ; v1(5915,3360) 5915,3345 5980,3280 5980,3145 6060,3065 6240,3065 ; 6270,2445 6270,3065 v2@6395,3065
  Bottom Layer w25: U5.7@4597.5,3447.5 U5.7 ; U5.4 4690,3290 4735,3335 ; U5.6 4635,3390 4700,3455 ; 4735,3455 4735,3335 ; U5.10 4740,3340 4735,3335 ; 5735,3350 5740,3345
  Bottom Layer w30: J6.2 6105,4350 6135,4380 6345,4380 6380,4345 6380,4200 ; R26.1 6255,4175 6280,4200 6380,4200 ; v2@6375,3055 6390,3055 6405,3070 6395,3080 6395,4185 6380,4200
  Bottom Layer w40: R7.1 2074.32,3525 C10.2 C10.2@2160.32,3525 ; 2120,3350 2121.54,3351.54 2121.54,3398.19 ; 2120,3450 2120,3430.12 U3.2 2121.54,3398.19 ; C14.1 2171.32,3536 C10.2@2160.32,3525 ; C15.1 C11.2@2409,3356 ; C12.1@2564,3280 C12.1@2569,3285 ; 2930,3265 U4.2 ; C9.2@3150,3265 3167.22,3282.22 C9.2 3196,3311 C13.1 ; J5.1 3550,4385 3655,4385 3885,4155 U1.44 3941.57,4056.57 U1.43 3940,3820 3995,3765 C5.1@4165,3765 ; 2121.54,3398.19 U3.3 2160.32,3403.5 C10.2@2160.32,3525
  Bottom Layer w50: 2435,3257.2 2435,3285 C11.2 ; v1(3135,3565) 3135,3550 3325,3550 3355,3520 3355,3350 3316,3311 C13.1 ; v1(4255,3630) 4235,3630 4265,3660 C1.2 ; 4513.5,3491.5 4550,3455
  Bottom Layer w60: J4.2 1475,3180 1511,3216 C7.1 1611,3216 C3.2 C3.2@1651.25,3235 ; J3.2@1450,2945 2122.8,2945 U3.6 2435,3257.2 ; R27.2 1905,4186 C4.2 1843,3837 2069.32,3610.68 R7.1 ; 2435,3285 2569,3285 C12.1 ; C12.1@2564,3280 2660,3280 C8.2 2705,3265 2930,3265 C9.2@3150,3265 ; P1.8 2825,2870 U4.4 U4.4@2930,2875 ; C9.2@3167.22,3282.22 C9.2@3170.28,3282.22 ; J1.4 3995,2560 v1(4005,2570) ; C5.1 4259,3771 C1.2 4300.55,3729.45 U2.1 4390.55,3729.45 C2.2 4486,3634 C6.1 4486,3519 4513.5,3491.5 ; 4550,3455 4700,3455 4735,3455 4950,3455 4960,3445 4962.78,3445 5127.78,3280 5285,3280 5340,3335 5340,3360 ; v1(4890,2500) 4890,2505 4955,2570 J2.4 ; 5329,3355 5334,3360 5340,3360 ; C24.1 5379,3494 J8.3 5340,3360 ; v1(5915,3360) 5340,3360 ; S2.1 S2.2 S2.3 S2.4 S2.5 6375,3040 v2@6390,3055
  Bottom Layer w100: J4.2 J4.2@1450,3175 ; J3.2@1450,2880 1450,2945 J4.2@1450,3175 ; 1460,3017.2 1460,3165 J4.2@1450,3175
  other v2: 6375,3060
DIN: P1.4 U1.26 | length 3286.2
  Top Layer w18: v1(2417.5,2705) 2417.5,2732.5 2450,2765 2815,2765 2895,2685 3763.79,2685 3859,2780.21 3859,2903.6 4015.4,3060 5047.5,3060 v1(5152.5,2955)
  Bottom Layer w18: v1(2417.5,2705) 2425,2697.5 P1.4
  Bottom Layer w30: U1.26 v1@5140.39,2942.89
IN1_1: C22.1 J9.3 U7.3 | length 849.1
  Bottom Layer w18: J9.3 2184,4579 C22.1 2184,4486 2445,4225 2445,4151 2445,4000 2460,3985 U7.3
IN1_2: C23.1 J9.5 U7.5 | length 1163.7
  Bottom Layer w18: 2045,4590 2045,4340 2115,4270 2315,4270 2339,4246 2339,4245 2385,4199 2385,3965 2355,3935 U7.5
  Bottom Layer w30: C23.1 1990,4535 2045,4590 J9.5
IN2_1: C28.1 J10.1 U8.3 | length 2749.9
  Bottom Layer w20: U8.3 3325,3925 3280,3970 3280,4125 3264,4141 3264,4142.01 3250,4156.01 3250,4630 3345,4725 4620,4725 4710,4635 4745,4635 ; J10.1 4745,4635 ; C28.1 4745,4416 4745,4635
IN2_2: C29.1 J9.1 U8.5 | length 1478
  Bottom Layer w18: J9.1 2454,4631 C29.1 2454,4466 2540,4380 2540,4255 2610,4185 3180,4185 3235,4130 3235,3905 3205,3875 U8.5
IN3_1: C30.1 J10.5 U6.3 | length 1008.8
  Bottom Layer w18: J10.5 5200,4476 C30.1 ; U6.3 5270,3755 5265,3760 5265,3763.21 5250.49,3777.73 5250.49,4130.49 5356,4236 C30.1@5356,4290
IN3_2: C31.1 J10.3 U6.5 | length 1086
  Bottom Layer w18: J10.3 5000,4418.5 C31.1 5130,4325 5190,4265 5190,4255.98 5189.51,4255.49 5189.51,3727.73 5166.79,3705 U6.5
LED1: U1.68
LED2: U1.70
LED3: U1.72
LED4: U1.74
NetBZ1_2: BZ1.2 Q1.3 | length 122.3
  Bottom Layer w40: Q1.3 5815,3195 BZ1.2
NetD3_1: D3.1 R2.2 | length 139.8
  Top Layer w50: D3.1 1416,4232.22 R2.2
NetH1_2: H1.2 S1.2 | length 136.7
  Bottom Layer w50: S1.2 1591,3775 H1.2
NetQ1_1: Q1.1 R32.2 | length 191.8
  Bottom Layer w40: Q1.1 5735,3248 R32.2
NetR6_1: R6.1 R7.2 U3.1 | length 373.5
  Bottom Layer w40: R6.1 1893.5,3290 1985,3290 2021.14,3326.14 U3.1 2021.14,3425 1981.32,3464.83 R7.2
NetR16_1: R16.1 R22.2 U6.6 | length 1643.3
  Top Layer w25: v1(4500,4265) 4550,4215 4960,4215 5205,3970 5205,3770 5096,3661 v1(5024,3661)
  Bottom Layer w25: R16.1 4382.5,4397.5 4500,4280 v1(4500,4265) ; v1@5025,3660 v1(5024,3661) R22.2 5060.32,3745.32 5070,3755 U6.6
NetR17_1: R17.1 R23.2 U7.6 | length 1265.8
  Top Layer w25: v1(2195,3905) 2225,3905 2240,3920 2240,4190 2277.5,4227.5 2567.5,4227.5 2595,4200 2690,4200 2730,4240 2730,4259 v1(2736,4265)
  Bottom Layer w25: v1(2195,3905) 2195,3978.6 R23.2@2201.4,3985 ; R23.2 R23.2@2201.4,3985 ; U7.6 R23.2@2201.4,3985 ; R17.1 2736,4369 v1(2736,4265)
NetR18_1: R18.1 R20.2 U6.2 | length 1448.3
  Top Layer w25: v3(4670,4280) 4685,4280 4705,4260 4980,4260 5270,3970 5270,3785 5335,3720 5425,3720 v1(5430,3725)
  Bottom Layer w25: R18.1 4600,4350 v3(4670,4280) ; U6.2 R20.2 5416,3726 v1@5415,3725
NetR19_1: R19.1 R21.2 U7.2 | length 987
  Top Layer w25: v1(2630,3950) 2630,3940 2630,4090 2665,4125 2800,4125 v1(2935,4260) 2953,4260 2958,4265 v1@2940,4265
  Bottom Layer w25: U7.2 2606,4035 R21.2 2611,3959 2630,3940 v1(2630,3950) ; R19.1 2958,4367 2958,4265 2953,4260 v1(2935,4260)
NetR26_2: R26.2 S3.1 S4.1 S5.1 S6.1 | length 1057.7
  Bottom Layer w30: S6.1@6334.96,3345 6305,3345 6255,3395 6255,3605 ; S5.1@6334.96,3608.33 6258.33,3608.33 6255,3605 ; S4.1@6334.96,3871.67 6256.67,3871.67 6255,3870 ; S3.1@6334.96,4135 6334.96,4074.96 6290,4030 6256,4030 R26.2 6255,3870 ; 6255,3605 6255,3870
NetR28_1: R28.1 R31.2 U8.6 | length 994.7
  Top Layer w25: v1(3090,3815) 3090,3840 3250,4000 3250,4200 v1(3190,4260) 3200,4260 3205,4265 v1@3205,4250
  Bottom Layer w25: v1(3090,3815) 3070,3815 3069,3816 R31.2 3078.68,3925 U8.6 ; R28.1 3205,4340 3205,4265 3200,4260 v1(3190,4260)
NetR29_1: R29.1 R30.2 U8.2 | length 1563.3
  Top Layer w25: v1(3468,3877) 3475,3870 3475,4150 3560,4235 4265,4235 v1(4305,4275)
  Bottom Layer w25: U8.2 3446,3975 R30.2 3461,3884 v1(3468,3877) ; R29.1 4305,4280 v1(4305,4275)
OUT1_1: R13.2 R19.2 R19.3 U7.1 | length 976.6
  Top Layer w25: v1@2545,4165 2740,4165 v1(2837,4262) v1@2844,4262 ; v1@2844,4262 2847,4265 2850,4262 v1@2844,4262
  Bottom Layer w25: U7.1 U7.1@2545,4085 ; v1@2545,4165 U7.1@2545,4085 ; R13.2 2596,4085 U7.1@2545,4085 ; v1(2837,4262) 2844,4262 2847,4265 2820,4292 2820,4470 2875,4525 R19.3 R19.2
  other v1: 2530,4155
OUT1_2: R14.2 R17.2 R17.3 U7.7 | length 1356.4
  Top Layer w25: v1(2170,4185) 2170,4180 2185,4165 2185,4190 2260,4265 2625,4265 2635,4255 2650,4255 2645,4260 2645,4270 2640,4275 2630,4275 2630,4265 v1(2635,4265)
  Bottom Layer w25: v1(2170,4185) 2170,4180 2185,4165 2185,4096.6 R14.2 2221.6,4060 2245,4060 2270,4035 U7.7 ; v1(2635,4265) 2630,4265 2630,4275 2640,4275 2645,4270 2645,4260 2650,4255 2635,4255 2605,4285 2605,4480 2650,4525 R17.3 R17.2
OUT2_1: R24.2 R29.2 R29.3 U8.1 | length 1846.7
  Top Layer w25: v1(3385,4115) 3555,4285 4190,4285 4255,4350 4335,4350 v1(4405,4280)
  Bottom Layer w25: v1(3385,4115) 3385,4045.51 U8.1 3446,4025 R24.2 ; R29.2 R29.3 4240,4525 4305,4460 4305,4375 4402.5,4277.5 v1@4399.46,4274.46
OUT2_2: R25.2 R28.2 R28.3 U8.7 | length 852.2
  Top Layer w25: v1(3040,4110) 3040,4095 v1(3040,4260) v1@3050,4260
  Bottom Layer w25: v1(3040,4110) 3040,4095 3070,4065 3070,3986.32 R25.2 3079.32,3975 U8.7 ; v1(3040,4260) 3057,4277 3045,4289 3045,4460 3110,4525 R28.3 R28.2
OUT3_1: R12.2 R18.2 R18.3 U6.1 | length 1400.5
  Top Layer w25: v1(5130,4235) 5345,4020 v1(5345,3945)
  Bottom Layer w25: R18.2 R18.3 4605,4520 4635,4520 4710,4445 4710,4340 4790,4260 5105,4260 v1(5130,4235) ; U6.1 5365,3855 5385,3875 R12.2 5346,3945 v1(5345,3945)
OUT3_2: R15.2 R16.2 R16.3 U6.7 | length 1384.8
  Bottom Layer w25: R16.2 R16.3 4397.5,4510 4415,4510 4515,4410 4515,4360 4585,4290 4585,4250 4615,4220 4925,4220 5045,4100 5045,3846 R15.2 5055,3825 5075,3805 U6.7
P0: J5.5 U1.47 | length 726.2
  Bottom Layer w15: J5.5 3650,4495 3880,4265 4004.2,4265 4067.2,4202 4068,4202 4090,4180 4090,4105 U1.47
P1: J5.7 U1.48 | length 549.6
  Bottom Layer w16: J5.7 3930,4305 4005,4305 4140,4170 U1.48
P2: J5.9 U1.51 | length 682.3
  Bottom Layer w23: J5.9 3865,4495 4103,4257 4123,4257 4257.5,4122.5 4272.5,4122.5 U1.51
P3: J5.8 U1.54 | length 1061.5
  Bottom Layer w22: 4030,4585 4030,4430 4138.5,4321.5 4167.23,4321.5 4274.73,4214 4381,4214 U1.54
  Bottom Layer w30: J5.8 3740,4630 3775,4665 3950,4665 4030,4585 ; U1.54 U1.54@4440,4165
P4: J5.10 U1.52 | length 696.9
  Bottom Layer w22: J5.10 3915,4520 3915,4495 4120.5,4289.5 4145.5,4289.5 4280,4155 U1.52
P5: J5.6 U1.9 | length 3154
  Bottom Layer w16: v1@3560,4140.37 v1(3560,4130) 3540,4150 3470,4150 3435,4185 3336.87,4185 3278.5,4243.37 3278.5,4603.5 3370.5,4695.5 3549.5,4695.5 3640,4605 J5.6
  Bottom Layer w30: v1(3560,4130) 3563.48,4133.48 3783.48,4133.48 3847.5,4069.47 3847.5,3769.47 4155,3461.97 4155,2735 4197.5,2692.5 4277.5,2692.5 U1.9 ; v1@3575,4125 v1@3576.52,4123.48
P6: J5.4 U1.12 | length 2726.1
  Bottom Layer w25: J5.4 3470,4665 3405,4665 3309,4569 3309,4256 3345,4220 3750,4220 3885,4085 3885,3785 4215,3455 4215,3070 4430,2855 U1.12
PWM1: J7.2 U1.18 | length 893.3
  Bottom Layer w25: J7.2 4565,2562.07 4582.93,2580 4805,2580 4940,2715 4940,2865 4885,2920 4801.85,2920 U1.18
PWM2: J7.3 U1.20 | length 657.2
  Bottom Layer w25: 4465,2560 4520,2615 4790,2615 4900,2725 4900,2797.36 U1.20
PWM3: J7.4 U1.19 | length 594.1
  Bottom Layer w25: J7.4 4365,2540 4475,2650 4735,2650 U1.19
PWM4: J7.5 U1.17 | length 576.5
  Bottom Layer w25: J7.5 4440,2685 4670,2685 U1.17
PWM5: J8.1 U1.53 | length 1128.2
  Bottom Layer w25: U1.53 4530,3965 4670,3965 4755,3880 4755,3620 4855,3520 5092.5,3520 5145,3467.5 J8.1@5145,3440
Q1: U1.13 U5.1 | length 435.4
  Bottom Layer w25: U1.13 4537.64,3107.64 4570,3140 U5.1
Q2: U1.16 U5.13 | length 454
  Bottom Layer w25: U1.16 4745,2961.57 4745,3130 4805,3190 U5.13
REST: P1.1 U1.32 | length 3936.7
  Top Layer w18: v1(2125,2705) 2276,2856 2844,2856 2925,2775 3735,2775 3775,2815 3775,2938.39 3980.61,3144 5256,3144 v1(5445,2955)
  Bottom Layer w18: P1.1 v1(2125,2705)
  Bottom Layer w30: U1.32 5439.61,2949.61 v1(5445,2955)
RXD: J6.3 U1.83 | length 276.9
  Bottom Layer w30: U1.83 6005,4120 J6.3
S1: S3.2 U1.81 | length 295.5
  Bottom Layer w30: U1.81 5937.48,3957.52 S3.2@6095.12,3957.52
S2: S4.2 U1.82 | length 616.2
  Bottom Layer w30: U1.82 5780,4095 5780,4009.3 S4.2@6095.12,3694.19
S3: S5.2 U1.80 | length 876.5
  Bottom Layer w30: U1.80 5740,3850 6090,3500 6090,3445.74 S5.2@6074.26,3430
S4: S6.2 U1.78 | length 1170.9
  Bottom Layer w30: U1.78 5700,4095 5700,3800.1 ; 5700,3795 6034.26,3460.74 6034.26,3235.74 6040,3230 6040,3222.64 S6.2@6095.12,3167.52
TXD: J6.4 U1.84 | length 164.5
  Bottom Layer w30: J6.4 5940,4270 U1.84
VCC: J3.1 J4.1 S1.1 | length 1098.6
  Bottom Layer w80: J4.1 1445,3580 S1.1
  Bottom Layer w90: J3.1@1417.5,2597.5 1315,2700 1315,3250 J4.1
pads on no net: S1.3 U1.5 U1.6 U1.7 U1.8 U1.10 U1.14 U1.21 U1.22 U1.23 U1.25 U1.27 U1.29 U1.31 U1.34 U1.35 U1.36 U1.49 U1.50 U1.55 U1.56 U1.57 U1.58 U1.59 U1.60 U1.61 U1.64 U1.65 U1.66 U1.67 U1.69 U1.71 U1.73 U1.75 U1.76 U1.77 U1.79 U5.2 U5.12

## Keep-outs
Keep-Out Layer:
  lines w10: 1230,4445 1775,4445 1775,4750 ; 2820,4750 4765,4750 ; 5495,4750 5495,4445 6445,4445 ; 1230,2380 1230,4750 6445,4750 6445,2380 1230,2380 ; 3405,2825 3405,3470 3730,3470 3740,3470 3740,2825 3725,2825 3405,2825

## Other copper
Top Layer:
  text "南昌大学" at 1245,4330 h150
  text "GND" at 5315,3330 h55
  text "2014-3-11" at 1705,2865 h60
  text "5V" at 3260,2540 h60
  text "GND" at 4970,2440 h55
  text "5V" at 5220,2435 h55
  text "ROTK" at 1330,2410 h160
  text "5V" at 4730,2410 h55
  text "队员：郭美钦、刘雨曦、龚思敏" at 1735,2400 h150
Bottom Layer:
  text "南昌大学" at 1745,4310 h150
  text "GND" at 5600,3520 h55
  text "ROTK" at 3315,2575 h150
  text "2014-3-11" at 5890,2460 h60
  text "队员：郭美钦、刘雨曦、龚思敏" at 3305,2410 h150

## Silkscreen, mask and mechanical layers (free items; w line width, h text height)
Mechanical 15:
  lines w10: 1000,4990 1000,5010 ; 1060,4980 1000,5000 ; 1060,5020 1000,5000 ; 1883.65,5000 1000,5000 ; 2675.4,5000 3559.06,5000 ; 3499.06,4980 3559.06,5000 ; 3499.06,5020 3559.06,5000 ; 3559.06,4990 3559.06,5010
  text "2559.055 (mil)" at 1893.65,4964.01 h30

## Text inside footprints (layer, text, board x,y; h text height)
C1: Bottom Overlay "+" at 4295,3975 h30 r90
C2: Bottom Overlay "+" at 4685,3615 h30
C3: Bottom Overlay "+" at 1660,3445 h30 r90
C8: Bottom Overlay "+" at 2705,3505 h30 r90
C9: Bottom Overlay "+" at 3210,3505 h30 r90
C10: Bottom Overlay "+" at 2365,3495 h30
C11: Bottom Overlay "+" at 2465,3540 h30 r90
J5: Top Overlay "10" at 3900,4575 h30; Top Overlay "9" at 3900,4475 h30; Top Overlay "1" at 3360,4475 h30; Top Overlay "2" at 3340,4575 h30
U1: Top Overlay "TF" at 5915,3465 h30 r90